# EAGLE board PCB-ETHMG-BOS (EAGLE 7.7.0)
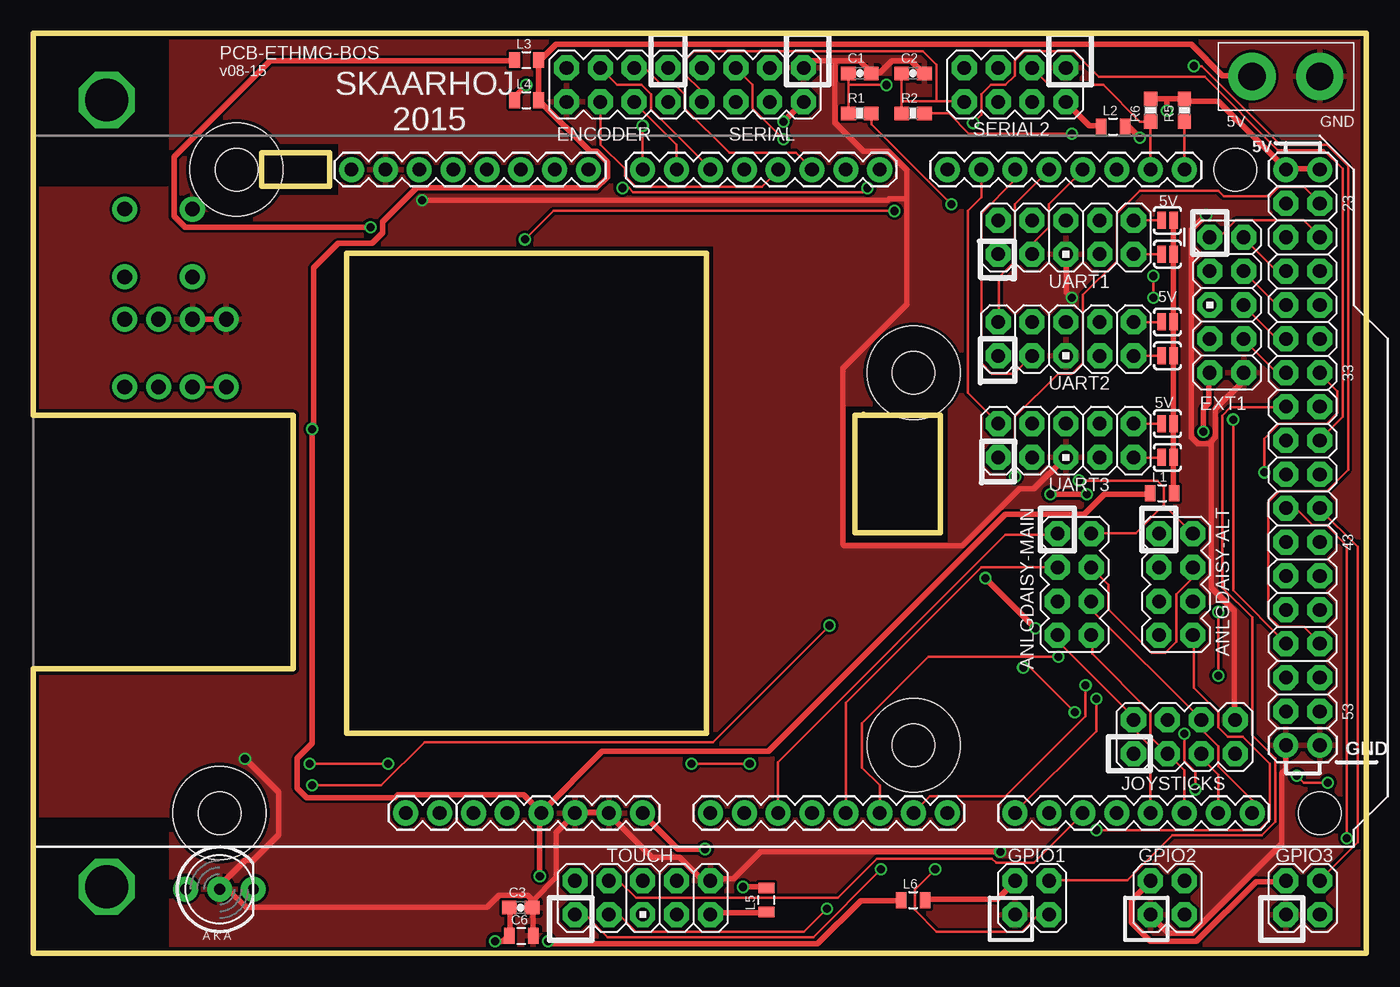
[diagram p0: board, top side]
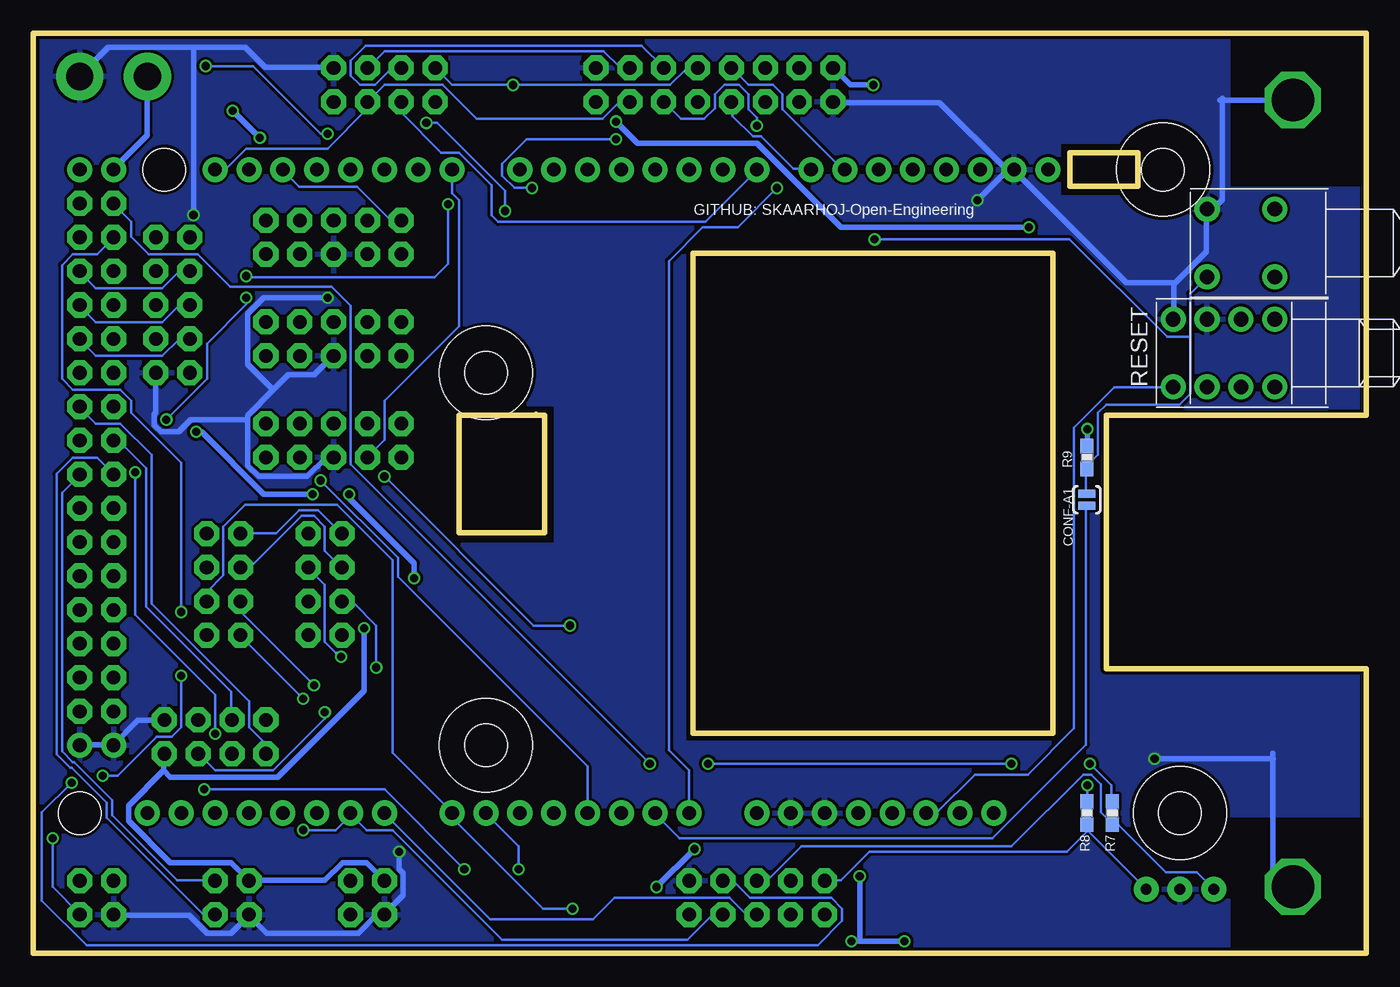
[diagram p1: board, bottom side, seen from below]

Size 100 x 69 mm. Coordinates in mm from the lower left corner, seen from the top.
Outline: 0,0 0,21.34 19.5,21.34 19.5,40.34 0,40.34 0,69 100,69 100,0 0,0
Copper layers (1*16): Top 0.035mm / dielectric 1.5mm / Bottom 0.035mm
Design rules "Fusion_eagle_rule_v1.1": minimum track width 6mil, minimum drill 12mil, track to track 6mil, track to pad 6mil, pad to pad 6mil, via to via 6mil, smd to smd 0mil, copper to edge 10mil, drill to drill 10mil, minimum pad ring 10mil, minimum via ring 6mil, stop-mask expansion 2mil, vias tented up to drill 100mil, thermal gap 10mil
Net classes: 0 default: width 0.203 mm, drill 0.61 mm, clearance 0.203 mm; 1 Power: width 0.406 mm, drill 0.61 mm, clearance 0.203 mm; 2 RELAY LINES: width 0.305 mm, clearance 0.203 mm; 3 INput lines: clearance 0.203 mm
Holes 7 mm at 13.97,10.53 15.24,58.78 66.04,43.55 66.04,15.61
tRestrict: area 0,0 to 10.2,10.2; area 0,57.5 to 10.2,68.9; area 61,30.8 to 68.6,41; area 16.5,56.9 to 22.9,60.7; area 23,16 to 51,53
bRestrict: area 0,57.5 to 10.2,68.9; area 0,0 to 10.2,10.2; area 61,30.8 to 68.6,41; area 16.5,56.9 to 22.9,60.7; area 23,16 to 51,53
Milling: 14 lines

## Footprints (pad centres in the part's own frame; a part is rotated, then mirrored left to right if it is on the bottom)
2X4 = drill 1.016 pad 1.88 octagon: 1 -3.81,-1.27; 2 -3.81,1.27; 3 -1.27,-1.27; 4 -1.27,1.27; 5 1.27,-1.27; 6 1.27,1.27; 7 3.81,-1.27; 8 3.81,1.27
0603-CAP = smd 1.1 x 1: 1 -0.85,0; 2 0.85,0
0805 = smd 0.8 x 1.2: 1 -0.9,0; 2 0.9,0
PUSHBUTTON = drill 1.1 pad 1.88: 1 2.54,2.54; 2 2.54,-2.54; 3 -2.54,2.54; 4 -2.54,-2.54
SJ_2S-NO = smd 0.635 x 1.27: 1 -0.45,0; 2 0.45,0
AVR_ICSP = drill 1.016 pad 1.88 octagon: 1 -1.27,5.08; 2 1.27,5.08; 3 -1.27,2.54; 4 1.27,2.54; 5 -1.27,0; 6 1.27,0; 7 -1.27,-2.54; 8 1.27,-2.54; 9 -1.27,-5.08; 10 1.27,-5.08
2X2 = drill 1.016 pad 1.88 octagon: 1 -3.81,-1.27; 2 -3.81,1.27; 3 -1.27,-1.27; 4 -1.27,1.27
1X02 = drill 1.016 pad 1.88: 1 0,0; 2 2.54,0
1X02_XTRA_BIG = drill 2.057 pad 3.556: 1 -2.54,0; 2 2.54,0
0603-RES = smd 1.1 x 1: 1 -0.85,0; 2 0.85,0
ARDUINO_MEGA = drill 1.016 pad 1.88: 0 63.5,50.8; 1 60.96,50.8; 2 58.42,50.8; 3 55.88,50.8; 3.3V 35.56,2.54; 4 53.34,50.8; 5 50.8,50.8; 5V@0 38.1,2.54; 5V@1 93.98,50.8; 5V@2 96.52,50.8; 6 48.26,50.8; 7 45.72,50.8; 8 41.656,50.8; 9 39.116,50.8; 10 36.576,50.8; 11 34.036,50.8; 12 31.496,50.8; 13 28.956,50.8; 14 68.58,50.8; 15 71.12,50.8; 16 73.66,50.8; 17 76.2,50.8; 18 78.74,50.8; 19 81.28,50.8; 20 83.82,50.8; 21 86.36,50.8; A0 50.8,2.54; A1 53.34,2.54; A2 55.88,2.54; A3 58.42,2.54; A4 60.96,2.54; A5 63.5,2.54; A6 66.04,2.54; A7 68.58,2.54; A8 73.66,2.54; A9 76.2,2.54; A10 78.74,2.54; A11 81.28,2.54; A12 83.82,2.54; A13 86.36,2.54; A14 88.9,2.54; A15 91.44,2.54; AREF 23.876,50.8; GND@0 40.64,2.54; GND@1 43.18,2.54; GND@2 93.98,7.62; GND@3 96.52,7.62; GND@4 26.416,50.8; RESET 33.02,2.54; VIN 45.72,2.54 | drill 1.016 pad 1.88 octagon: 22 93.98,48.26; 23 96.52,48.26; 24 93.98,45.72; 25 96.52,45.72; 26 93.98,43.18; 27 96.52,43.18; 28 93.98,40.64; 29 96.52,40.64; 30 93.98,38.1; 31 96.52,38.1; 32 93.98,35.56; 33 96.52,35.56; 34 93.98,33.02; 35 96.52,33.02; 36 93.98,30.48; 37 96.52,30.48; 38 93.98,27.94; 39 96.52,27.94; 40 93.98,25.4; 41 96.52,25.4; 42 93.98,22.86; 43 96.52,22.86; 44 93.98,20.32; 45 96.52,20.32; 46 93.98,17.78; 47 96.52,17.78; 48 93.98,15.24; 49 96.52,15.24; 50 93.98,12.7; 51 96.52,12.7; 52 93.98,10.16; 53 96.52,10.16 | hole 3.2: 15.24,50.8; 13.97,2.54; 66.04,35.56; 66.04,7.62; 90.17,50.8; 96.52,2.54
3.2MMPAD = drill 3.2 octagon: P$1 0,0
LED5MM-BICOLOR = drill 0.813 pad 1.88: A2 2.54,0; A3 -2.54,0; K1 0,0

## Placement (x,y rotation side)
ANLGDAISY-ALT  M04X2  [2X4]  85.72,27.67 270 top
ANLGDAISY-MAIN  M04X2  [2X4]  78.11,27.67 270 top
C1  220pF?  [0603-CAP]  62,66 0 top
C2  220pF?  [0603-CAP]  66,66 0 top
C3  100nF  [0603-CAP]  36.57,3.43 0 top
C6  22uF  [0805]  36.61,1.3 0 top
CONF  [PUSHBUTTON]  9.4,53.27 90 bottom
CONF-A1  SOLDERJUMPERNO  [SJ_2S-NO]  20.95,34.02 270 bottom
ENCODER  M04X2  [2X4]  43.81,65.14 180 top
EXT1  M05X2PTH  [AVR_ICSP]  89.53,48.62 0 top
GPIO1  M02X2  [2X2]  77.47,4.17 0 top
GPIO2  M02X2  [2X2]  87.63,4.17 0 top
GPIO3  M02X2  [2X2]  97.79,4.17 0 top
JOYSTICKS  M04X2  [2X4]  86.36,16.24 0 top
JP1  [1X02]  27.94,10.53 0 top
JP8  [1X02_XTRA_BIG]  93.98,65.77 180 top
L1  [0805]  84.7,34.51 0 top
L2  [0805]  81,62 0 top
L3  [0805]  37,67 0 top
L4  [0805]  37,64 0 top
L5  [0805]  55,4 90 top
L6  [0805]  66,4 0 top
R1  ?  [0603-RES]  62,63 0 top
R2  ?  [0603-RES]  66,63 0 top
R5  1K5  [0603-RES]  86.36,63.23 90 top
R6  1K5  [0603-RES]  83.82,63.23 90 top
R7  270R  [0603-RES]  19.05,10.53 90 bottom
R8  270R  [0603-RES]  20.95,10.53 90 bottom
R9  10K  [0603-RES]  20.95,37.2 270 bottom
RESET  [PUSHBUTTON]  11.94,45.02 90 bottom
RESETA  [PUSHBUTTON]  9.4,45.02 90 bottom
SERIAL  M04X2  [2X4]  53.98,65.14 180 top
SERIAL2  M04X2  [2X4]  73.66,65.14 180 top
SJ1  SOLDERJUMPERNO  [SJ_2S-NO]  85.09,54.98 0 top
SJ2  SOLDERJUMPERNO  [SJ_2S-NO]  85.09,52.44 180 top
SJ3  SOLDERJUMPERNO  [SJ_2S-NO]  85.09,44.81 180 top
SJ4  SOLDERJUMPERNO  [SJ_2S-NO]  85.09,47.35 0 top
SJ5  SOLDERJUMPERNO  [SJ_2S-NO]  85.09,39.73 0 top
SJ6  SOLDERJUMPERNO  [SJ_2S-NO]  85.09,37.2 180 top
TOUCH  M05X2PTH  [AVR_ICSP]  45.72,4.17 90 top
U1  ARDUINO-MEGAFULL  [ARDUINO_MEGA]  0,7.99 0 top
U$1  GNDPAD  [3.2MMPAD]  5.5,64 0 top
U$15  LEDBICOLOR-AKA  [LED5MM-BICOLOR]  13.97,4.81 0 top
U$20  GNDPAD  [3.2MMPAD]  5.5,5 0 top
UART1  M05X2PTH  [AVR_ICSP]  77.47,53.7 90 top
UART2  M05X2PTH  [AVR_ICSP]  77.47,46.09 90 top
UART3  M05X2PTH  [AVR_ICSP]  77.47,38.47 90 top

## Library data of the parts
ANLGDAISY-ALT ANLGDAISY-MAIN C1-C3 C6 CONF-A1 ENCODER EXT1 JOYSTICKS JP1 JP8 L1-L6 R1 R2 R5-R9 SERIAL SERIAL2 SJ1-SJ6 TOUCH UART1-UART3 = SparkFun
CONF GPIO1-GPIO3 RESET RESETA U1 U$1 U$15 U$20 = SKAARHOJ

## Nets
5V [Power]: C3.1 C6.1 JP8.2 L1.1 L2.2 L3.2 L4.2 L6.1 R5.2 R6.2 R9.1 U1.5V@0 U1.5V@1 U1.5V@2
A0: SERIAL2.5 SERIAL.5 U1.A0
A1: CONF-A1.2 U1.A1
A2: ANLGDAISY-ALT.1 ANLGDAISY-MAIN.1 U1.A2
A3: ANLGDAISY-ALT.2 ANLGDAISY-MAIN.2 U1.A3
A4: ANLGDAISY-ALT.3 ANLGDAISY-MAIN.3 U1.A4
A5: ANLGDAISY-ALT.4 ANLGDAISY-MAIN.4 U1.A5
A6: ANLGDAISY-ALT.5 TOUCH.1 U1.A6
A7: ANLGDAISY-ALT.6 TOUCH.3 U1.A7
A8: ANLGDAISY-ALT.7 TOUCH.5 U1.A8
A9: ANLGDAISY-ALT.8 TOUCH.7 U1.A9
A10: TOUCH.4 U1.A10
A11: U1.A11
A12: ANLGDAISY-MAIN.7 JOYSTICKS.2 U1.A12
A13: ANLGDAISY-MAIN.8 JOYSTICKS.3 U1.A13
A14: ANLGDAISY-MAIN.5 JOYSTICKS.5 U1.A14
A15: ANLGDAISY-MAIN.6 JOYSTICKS.6 U1.A15
D2: ENCODER.3 U1.2
D3: ENCODER.6 U1.3
D4: U1.4
D5: ENCODER.5 U1.5
D6: ENCODER.4 U1.6
D7: SERIAL2.6 SERIAL.6 U1.7
D8: ENCODER.2 U1.8
D9: ENCODER.1 U1.9
D22: R7.2 U1.22
D23: R8.2 U1.23
D24: TOUCH.8 U1.24
D37: CONF-A1.1 CONF.3 R9.2 U1.37
EXT1: EXT1.1 U1.25
EXT2: EXT1.2 U1.26
EXT3: EXT1.3 U1.27
EXT4: EXT1.4 U1.28
EXT5: EXT1.5 U1.29
EXT6: EXT1.6 U1.30
EXT7: EXT1.7 U1.31
EXT8: EXT1.8 U1.32
GND [Power]: C1.2 C2.2 C3.2 C6.2 CONF.1 ENCODER.8 EXT1.10 GPIO1.1 GPIO2.1 GPIO3.1 JOYSTICKS.8 JP8.1 RESET.1 RESETA.1 SERIAL2.1 SERIAL.1 TOUCH.10 U1.GND@0 U1.GND@1 U1.GND@2 U1.GND@3 U1.GND@4 U$1.P$1 U$15.K1 U$20.P$1 UART1.5 UART2.5 UART3.5
GPIO1-1: GPIO1.3 U1.33
GPIO1-2: GPIO1.4 U1.34
GPIO2-1: GPIO2.3 U1.38
GPIO2-2: GPIO2.4 U1.39
GPIO3-1: GPIO3.3 U1.40
GPIO3-2: GPIO3.4 U1.41
I2C_SCL: R5.1 SERIAL2.4 SERIAL.4 U1.21
I2C_SDA: R6.1 SERIAL2.3 SERIAL.3 U1.20
MOSI: C2.1 R2.1 SERIAL2.8 SERIAL.8
N$1 [Power]: L2.1 SERIAL2.2
N$2 [Power]: L3.1 SERIAL.2
N$3: SJ6.2 UART3.9
N$4 [Power]: ENCODER.7 L4.1
N$5 [Power]: L5.1 TOUCH.9
N$6: SJ3.2 UART2.9
N$7 [Power]: EXT1.9 GPIO1.2 GPIO2.2 GPIO3.2 JOYSTICKS.7 L6.2
N$8 [Power]: L1.2 SJ1.2 SJ2.1 SJ3.1 SJ4.2 SJ5.2 SJ6.1
N$9: SJ2.2 UART1.9
N$10: SJ1.1 UART1.10
N$11: R1.2 U1.48
N$12: SJ4.1 UART2.10
N$13: SJ5.1 UART3.10
N$14: R2.2 U1.49
N$17: R8.1 TOUCH.2 U$15.A2
N$18: U1.53
N$19: U1.52
N$20: U1.51
N$21: U1.50
N$22: R7.1 TOUCH.6 U$15.A3
N$24: U1.47
N$25: U1.46
N$26: U1.45
N$27: U1.44
N$28: U1.43
N$29: U1.42
RESET: RESET.3 RESETA.3 U1.RESET
RXD1: U1.19 UART1.2
RXD2: U1.17 UART2.2
RXD3: U1.15 UART3.2
SCLK: C1.1 R1.1 SERIAL2.7 SERIAL.7
SW1: JOYSTICKS.1 U1.35
SW2: JOYSTICKS.4 U1.36
TXD1: U1.18 UART1.3
TXD2: U1.16 UART2.3
TXD3: U1.14 UART3.3
VIN [Power]: L5.2 U1.VIN

## Tracks (layer width: path | path; a pad name or v marks a point on that pad's centre or on a via)
5V  (via drill 0.61)
  Top 0.406: C3.1 35.76,3.35 35.76,1.32 C6.1 35.56,1.22 35.26,0.91 v34.65,0.91 | v38.61,0.91 38.81,0.71 58.83,0.71 62.08,3.96 65.02,3.96 L6.1 | 85.04,64.11 86.36,64.11 R5.2 86.46,63.91 88.9,63.91 93.98,58.83 U1.5V@1 94.08,58.83 96.52,58.83 U1.5V@2 | 85.04,64.11 83.82,64.11 R6.2 | v83.01,61.16 82.19,61.98 81.99,61.98 L2.2 | 85.04,64.11 v85.04,63.2 | U1.5V@0 38.1,10.57 36.78,11.89 27.33,11.89 27.13,11.68 20.52,11.68 19.81,12.39 19.81,14.63 20.93,15.75 v20.93,39.32 21.03,39.42 21.03,51.41 22.86,53.24 25.4,53.24 26.21,54.05 26.21,54.86 28.75,57.4 42.27,57.4 43.08,58.22 43.08,59.33 42.27,60.15 41.76,60.15 38,63.91 L4.2 37.9,66.95 L3.2 38.1,67.06 39.22,68.17 86.87,68.17 89.2,65.84 91.44,65.84 JP8.2 | L1.1 83.72,34.44 80.37,34.44 78.84,32.92 72.95,32.92 55.17,15.14 42.67,15.14 38.2,10.67 U1.5V@0 | v38,5.79 38,10.36 U1.5V@0
  Bottom 0.406: v34.65,0.91 38,0.91 | 38,0.91 v38.61,0.91 | v85.04,63.2 v83.01,61.16 | JP8.2 91.44,61.37 93.98,58.83 U1.5V@1 | v20.93,39.32 20.93,38.1 R9.1 | v38,5.79 38,0.91
A0  (via drill 0.61)
  Top 0.203: v44.2,57.4 44.7,57.4 45.01,57.1 62.28,57.1 v62.59,57.4 | v56.29,61.06 53.95,63.4 53.95,65.13 52.73,66.34 SERIAL.5
  Bottom 0.203: U1.A0 50.8,13.72 52.32,15.24 52.32,51.92 49.78,54.46 47.14,54.46 v44.2,57.4 | v62.59,57.4 63.91,57.4 64.82,58.32 64.82,59.23 62.99,61.06 v56.29,61.06 | SERIAL2.5 72.44,66.34 73.15,66.34 74.37,65.13 75.49,65.13 76.2,65.84 76.2,66.95 75.08,68.07 54.36,68.07 52.73,66.45 SERIAL.5
A1
  Bottom 0.203: CONF-A1.2 21.03,33.53 21.03,15.65 28.04,8.64 51.51,8.64 53.34,10.46 U1.A1
A2
  Top 0.203: U1.A2 55.88,14.33 72.95,31.39 76.81,31.39 ANLGDAISY-MAIN.1
  Bottom 0.203: ANLGDAISY-ALT.1 84.43,31.5 81.79,31.5 80.06,33.22 78.64,33.22 76.91,31.5 ANLGDAISY-MAIN.1
A3  (via drill 0.61)
  Top 0.203: v78.44,35.46 84.33,35.46 84.84,34.95 84.84,33.63 | 84.84,33.63 86.97,31.5 ANLGDAISY-ALT.2 | 84.84,33.63 82.7,31.5 79.45,31.5 ANLGDAISY-MAIN.2
  Bottom 0.203: U1.A3 58.42,14.02 72.64,28.25 72.64,29.67 v78.44,35.46
A4
  Top 0.203: U1.A4 60.96,18.8 71.12,28.96 76.81,28.96 ANLGDAISY-MAIN.3
  Bottom 0.203: ANLGDAISY-ALT.3 84.43,28.96 83.72,28.96 79.86,32.82 78.94,32.82 78.13,32 78.13,30.18 76.91,28.96 ANLGDAISY-MAIN.3
A5  (via drill 0.61)
  Top 0.203: U1.A5 63.5,12.6 62.18,13.92 62.18,17.27 67.16,22.25 v76.91,22.25 | ANLGDAISY-ALT.4 86.97,28.85 86.97,28.14 85.75,26.92 85.75,23.37 84.94,22.55 83.92,22.55 80.67,25.81 80.67,27.64 79.45,28.85 ANLGDAISY-MAIN.4
  Bottom 0.203: v76.91,22.25 77.22,22.55 77.32,22.55 78.13,23.37 78.13,27.64 79.35,28.85 ANLGDAISY-MAIN.4
A6  (via drill 0.61)
  Top 0.203: v63.6,6.3 58.52,1.22 43.08,1.22 41.45,2.85 40.64,2.85 TOUCH.1 | v78.94,20.12 78.94,17.78 72.95,11.79 67.26,11.79 66.04,10.57 U1.A6
  Bottom 0.203: v63.6,6.3 63.6,8.03 66.04,10.46 U1.A6 | v78.94,20.12 84.43,25.6 84.43,26.31 ANLGDAISY-ALT.5
A7  (via drill 0.61)
  Top 0.203: v59.54,3.35 57.81,1.63 45.21,1.63 43.99,2.85 43.18,2.85 TOUCH.3
  Bottom 0.203: v59.54,3.35 61.77,3.35 68.58,10.16 U1.A7 68.58,10.57 73.05,15.04 73.05,29.46 77.22,33.63 84.12,33.63 85.75,32 85.75,28.35 86.97,27.13 86.97,26.42 ANLGDAISY-ALT.6
A8  (via drill 0.61)
  Top 0.203: v79.76,19.1 79.76,16.66 73.66,10.57 U1.A8
  Bottom 0.203: TOUCH.5 45.72,2.95 46.53,2.95 47.75,4.17 56.39,4.17 58.01,2.54 65.73,2.54 73.66,10.46 U1.A8 | v79.76,19.1 84.43,23.77 ANLGDAISY-ALT.7
A9  (via drill 0.61)
  Top 0.203: v79.76,9.25 91.95,9.25 92.76,10.06 92.76,14.22 90.73,16.26 89.61,16.26 88.9,16.97 88.9,18.09 87.07,19.91 87.07,23.77 ANLGDAISY-ALT.8
  Bottom 0.203: TOUCH.7 48.26,2.85 49.07,2.85 50.9,1.02 64.82,1.02 73.05,9.25 74.98,9.25 76.2,10.46 U1.A9 76.2,10.36 77.32,9.25 v79.76,9.25
A10
  Top 0.203: TOUCH.4 43.18,5.38 43.99,5.38 45.21,4.17 60.35,4.17 63.3,7.11 71.93,7.11 72.24,6.81 75.08,6.81 78.74,10.46 U1.A10
A12
  Top 0.203: U1.A12 83.82,15.54 82.6,16.76 82.6,17.48 JOYSTICKS.2 82.5,17.58 82.5,17.78 76.91,23.37 76.91,23.77 ANLGDAISY-MAIN.7
A13
  Top 0.203: U1.A13 86.36,13.72 85.14,14.94 JOYSTICKS.3 85.04,15.04 83.82,16.26 83.82,18.09 79.45,22.45 79.45,23.77 ANLGDAISY-MAIN.8
A14  (via drill 0.61)
  Top 0.203: U1.A14 88.9,13.41 87.68,14.63 87.68,14.94 JOYSTICKS.5 | v74.27,21.44 74.78,21.44 v78.13,18.09
  Bottom 0.203: v74.27,21.44 74.27,24.59 76,26.31 76.81,26.31 ANLGDAISY-MAIN.5 | v78.13,18.09 78.13,17.58 81.99,13.72 86.36,13.72 87.58,14.94 JOYSTICKS.5
A15
  Top 0.203: U1.A15 91.44,11.48 88.9,14.02 88.9,15.54 87.68,16.76 87.68,17.48 JOYSTICKS.6 87.58,17.58 79.45,25.7 79.45,26.31 ANLGDAISY-MAIN.6
D2
  Top 0.203: ENCODER.3 45.11,66.34 45.92,66.34 47.14,65.13 48.16,65.13 48.87,64.41 48.87,63.4 52.22,60.05 57.2,60.05 58.42,58.83 U1.2
D3
  Top 0.203: ENCODER.6 42.57,63.8 42.57,60.66 44.4,58.83 44.4,58.32 45.21,57.51 54.66,57.51 55.88,58.73 U1.3
D5
  Top 0.203: U1.5 50.8,58.83 46.33,63.3 46.33,64.41 45.62,65.13 43.79,65.13 42.57,66.34 ENCODER.5
D6
  Top 0.203: U1.6 48.26,60.66 45.11,63.8 ENCODER.4
D7  (via drill 0.61)
  Top 0.203: v45.72,62.08 U1.7
  Bottom 0.203: v45.72,62.08 45.72,62.69 46.33,63.3 46.33,64.41 47.04,65.13 48.16,65.13 48.87,64.41 48.87,63.4 49.68,62.59 51.41,62.59 52.63,63.8 SERIAL.6 | SERIAL2.6 72.34,63.8 72.34,62.99 69.39,60.05 68.07,60.05 65.63,57.61 65.63,55.37 65.13,54.86 49.58,54.86 45.72,58.73 U1.7
D8
  Bottom 0.203: U1.8 41.66,58.83 42.98,58.83 45.41,61.27 46.02,61.27 47.55,62.79 47.55,63.8 ENCODER.2
D9
  Bottom 0.203: U1.9 39.12,58.83 39.32,58.83 43.79,63.3 43.79,64.41 44.5,65.13 46.33,65.13 47.55,66.34 ENCODER.1
D22  (via drill 0.61)
  Top 0.203: v26.62,14.22 v20.73,14.22 | v53.75,14.22 v49.38,14.22
  Bottom 0.203: v20.73,14.22 19.1,12.6 19.1,11.38 R7.2 | v49.38,14.22 v26.62,14.22 | v53.75,14.22 76.2,36.68 76.2,48.56 77.62,49.99 85.24,49.99 87.68,52.43 91.34,52.43 92.66,53.75 92.66,54.86 93.98,56.19 U1.22
D23  (via drill 0.61)
  Top 0.203: v20.93,12.6 26.11,12.6 29.36,15.85 51,15.85 v59.74,24.59 | v73.66,35.76 73.66,40.23 76.91,43.48 77.93,43.48 78.74,44.3 78.74,49.38 81.28,51.92 81.28,55.47 83.01,57.2 88.9,57.2 89.31,56.79 92.76,56.79 93.47,57.51 95.3,57.51 96.52,56.29 U1.23
  Bottom 0.203: v20.93,12.6 20.93,11.38 R8.2 | v59.74,24.59 62.48,24.59 v73.66,35.76
D24  (via drill 0.61)
  Top 0.203: v97.13,12.8 95.3,12.8 v94.79,13.31 | v88.9,25.6 v88.9,20.83
  Bottom 0.203: v97.13,12.8 99.36,10.57 99.36,3.96 96.01,0.61 41.15,0.61 39.32,2.44 39.32,3.35 40.13,4.17 46.23,4.17 47.45,5.38 48.26,5.38 TOUCH.8 | v94.79,13.31 93.67,13.31 90.73,16.26 89.61,16.26 88.9,16.97 v88.9,20.83 | v88.9,25.6 88.9,36.78 92.66,40.54 92.66,41.45 93.47,42.27 97.03,42.27 97.84,43.08 97.84,51.61 97.03,52.43 95.2,52.43 93.98,53.65 U1.24
D37  (via drill 0.61)
  Top 0.203: v70.51,62.28 71.12,62.89 71.12,64.41 71.83,65.13 72.95,65.13 73.66,65.84 73.66,66.95 74.37,67.67 78.03,67.67 79.96,65.73 87.88,65.73 93.37,60.25 96.83,60.25 98.25,58.83 98.25,40.23 96.52,38.51 U1.37 | v64.62,55.68 39.01,55.68 v36.88,53.54
  Bottom 0.203: CONF-A1.1 21.03,34.54 21.03,36.27 R9.2 20.93,36.37 20.93,36.58 20.12,37.39 20.12,40.54 19.51,41.15 14.02,41.15 13.21,41.96 13.21,46.23 | 13.21,46.23 13.21,49.48 11.99,50.7 CONF.3 | v70.51,62.28 69.7,62.28 64.62,57.2 v64.62,55.68 | v36.88,53.54 22.25,53.54 14.94,46.23 13.21,46.23
EXT1
  Top 0.203: EXT1.1 88.29,53.75 89,53.75 90.22,54.97 95.3,54.97 96.52,53.75 U1.25
EXT2
  Top 0.203: U1.26 93.98,51.21 93.27,51.21 90.83,53.65 EXT1.2
EXT3
  Bottom 0.203: EXT1.3 88.29,51.1 89.1,51.1 90.32,49.89 95.3,49.89 96.52,51.1 U1.27
EXT4
  Top 0.203: U1.28 93.98,48.67 93.27,48.67 90.83,51.1 EXT1.4
EXT5
  Bottom 0.203: EXT1.5 88.29,48.56 89.1,48.56 90.32,47.35 95.3,47.35 96.52,48.56 U1.29
EXT6
  Top 0.203: U1.30 93.98,46.13 93.27,46.13 90.83,48.56 EXT1.6
EXT7
  Bottom 0.203: EXT1.7 88.29,46.02 89.1,46.02 90.32,44.81 95.3,44.81 96.52,46.02 U1.31
EXT8
  Top 0.203: U1.32 93.98,43.59 93.27,43.59 90.83,46.02 EXT1.8
GND  (via drill 0.61)
  Top 0.406: RESETA.1 11.99,47.55 14.43,47.55 RESET.1 | C6.2 37.49,1.32 37.49,3.35 C3.2 37.49,3.56 37.49,3.96 | 37.49,3.96 39.22,5.69 39.22,9.04 40.64,10.46 U1.GND@0 40.74,10.57 43.18,10.57 U1.GND@1 43.28,10.36 46.43,7.21 48.46,7.21 50.19,5.49 50.8,5.49 TOUCH.10 50.9,5.59 52.53,5.59 54.56,7.62 v72.54,7.62 | 37.49,3.96 37.08,4.37 34.95,4.37 34.04,3.45 15.95,3.45 14.63,4.78 14.02,4.78 U$15.K1 13.97,5.08 15.88,6.99 16.51,6.99 18.41,8.89 18.41,12.06 v15.88,14.61 | U1.GND@2 93.98,13.82 93.67,13.51 93.67,8.23 86.97,1.52 85.14,1.52 83.82,2.85 GPIO2.1 | C2.2 66.75,66.04 65.84,66.95 64.41,66.95 63.5,66.04 62.89,66.04 C1.2 62.79,66.14 61.98,66.95 60.15,66.95 | 60.15,66.95 58.32,66.95 57.81,66.45 SERIAL.1 | v77.93,49.17 77.52,49.58 77.52,52.43 UART1.5 | 60.15,66.95 60.15,62.28 62.28,60.15 64.11,60.15 65.53,58.73 65.53,56.59 | 65.53,56.59 65.53,48.67 60.76,43.89 60.76,30.68 60.86,30.58 69.7,30.58 73.97,34.85 75.08,34.85 77.42,37.19 UART3.5 | v87.99,55.37 86.87,54.25 86.87,38.71 87.38,38.2 88.19,38.2 88.29,38.3 | 88.29,38.3 88.7,38.71 88.7,40.84 90.73,42.88 90.73,43.48 EXT1.10 | JOYSTICKS.8 90.12,17.58 90.12,25.7 88.39,27.43 88.39,38.2 88.29,38.3 | v29.16,56.49 64.11,56.49 64.21,56.59 65.53,56.59
  Bottom 0.406: 14.43,50.19 11.99,52.63 11.99,55.78 CONF.1 11.43,55.88 10.79,56.52 10.79,64 | 14.43,50.19 14.43,47.65 RESET.1 | U1.GND@4 26.42,58.83 27.03,58.83 32,63.8 39.93,63.8 ENCODER.8 | 14.43,50.19 14.53,50.29 17.98,50.29 26.31,58.62 U1.GND@4 | JOYSTICKS.8 90.22,17.48 92.15,17.48 93.98,15.65 U1.GND@2 94.08,15.65 96.52,15.65 U1.GND@3 | GPIO3.1 93.98,2.85 88.29,2.85 86.97,1.52 85.14,1.52 83.92,2.74 GPIO2.1 83.82,2.85 82.5,1.52 75.59,1.52 74.27,2.85 73.66,2.85 GPIO1.1 73.56,3.05 72.24,4.37 72.24,5.99 72.54,6.3 v72.54,7.62 | 87.99,67.97 94.39,67.97 96.52,65.84 JP8.1 | 87.99,67.97 84.12,67.97 82.6,66.45 77.52,66.45 SERIAL2.1 | 83.92,40.03 83.92,40.34 81.99,42.27 | 83.92,40.03 83.92,36.58 83.11,35.76 79.45,35.76 78.03,37.19 77.52,37.19 UART3.5 | 81.99,42.27 80.87,43.38 78.94,43.38 77.52,44.81 UART2.5 | v77.93,49.17 82.7,49.17 83.92,47.95 83.92,44.2 81.99,42.27 | 83.92,40.03 88.19,40.03 89.1,39.12 90.42,39.12 90.93,39.62 90.93,40.44 90.83,40.54 90.83,43.48 EXT1.10 | v87.99,55.37 87.99,67.97 | v29.16,56.49 27.13,58.52 27.13,58.73 U1.GND@4 | U$1.P$1 10.79,64 | 10.79,64 11,64 | U$20.P$1 7,5 7,14.61 | 7,14.61 7,15 | 10.79,64.14 10.79,64 | 7,14.61 v15.88,14.61 | 6.99,14.61 7,14.61
  pour Top: 0,0 100,0 100,69 0,69
  pour Bottom: 0,0 100,0 100,69 0,69
GPIO1-1  (via drill 0.61)
  Top 0.203: v67.67,6.3 66.14,4.78 66.14,3.25 67.77,1.63 74.17,1.63 75.39,2.85 76.2,2.85 GPIO1.3 | v87.17,12.29 87.17,13.61 86.36,14.43 v86.36,16.46 | v92.35,36.07 92.35,38.61 93.47,39.73 97.03,39.73 97.84,40.54 97.84,42.16 96.52,43.48 U1.33
  Bottom 0.203: v67.67,6.3 73.66,12.29 v87.17,12.29 | v86.36,16.46 86.36,19.41 92.35,25.4 v92.35,36.07
GPIO1-2
  Top 0.203: GPIO1.4 76.2,5.49 82.09,5.49 85.45,8.84 92.15,8.84 93.17,9.86 93.17,14.63 91.44,16.36 91.44,25.2 89.2,27.43 89.2,40.34 89.81,40.95 93.98,40.95 U1.34
GPIO2-1
  Bottom 0.203: GPIO2.3 86.36,2.95 87.27,2.95 94.49,10.16 94.49,11.28 97.13,13.92 97.23,13.92 98.25,14.94 98.25,35.97 97.03,37.19 95.2,37.19 93.98,35.97 U1.38
GPIO2-2
  Bottom 0.203: GPIO2.4 86.36,5.49 89.2,5.49 94.08,10.36 94.08,11.48 96.93,14.33 97.03,14.33 97.84,15.14 97.84,34.54 96.52,35.87 U1.39
GPIO3-1  (via drill 0.61)
  Top 0.203: v98.55,8.64 98.55,30.58 97.03,32.11 96.01,32.11 94.79,33.33 93.98,33.33 U1.40
  Bottom 0.203: v98.55,8.64 98.55,4.98 96.52,2.95 GPIO3.3
GPIO3-2
  Top 0.203: GPIO3.4 96.52,5.49 99.36,8.33 99.36,30.48 96.52,33.33 U1.41
I2C_SCL
  Top 0.203: U1.21 R5.1
  Bottom 0.203: SERIAL.4 55.27,63.8 56.08,63.8 57.3,62.59 66.75,62.59 69.29,65.13 73.66,65.13 74.88,63.91 SERIAL2.4 74.98,63.8 74.98,63.3 77.93,60.35 84.02,60.35 85.55,58.83 86.36,58.83 U1.21
I2C_SDA
  Top 0.203: U1.20 R6.1 83.01,62.38 80.26,65.13 76.2,65.13 74.98,66.34 SERIAL2.3
  Bottom 0.203: SERIAL.3 55.27,66.45 55.98,66.45 57.2,67.67 73.66,67.67 74.88,66.45 SERIAL2.3
MOSI
  Top 0.203: 65.13,63.91 65.13,65.94 C2.1 | 65.13,63.91 65.13,63.09 R2.1 | 67.77,63.91 69.8,63.91 SERIAL2.8 | 67.77,63.91 65.13,63.91 | 67.77,63.91 67.77,66.65 66.75,67.67 49.58,67.67 48.87,66.95 48.87,65.94 50.09,64.72 50.09,63.91 SERIAL.8
N$1
  Top 0.406: L2.1 80.06,62.08 79.25,62.08 77.52,63.8 SERIAL2.2
N$2  (via drill 0.61)
  Top 0.406: v25.3,54.46 11.38,54.46 10.57,55.27 10.57,59.74 17.78,66.95 36.07,66.95 L3.1 | v56.29,62.38 57.71,63.8 SERIAL.2
  Bottom 0.406: v25.3,54.46 39.42,54.46 45.72,60.76 54.66,60.76 v56.29,62.38
N$3
  Top 0.203: SJ6.2 84.63,37.19 82.6,37.19 UART3.9
N$4  (via drill 0.61)
  Top 0.406: v36.98,65.13 36.17,64.31 36.17,64.01 L4.1
  Bottom 0.406: v36.98,65.13 38.71,65.13 39.93,66.34 ENCODER.7
N$5
  Top 0.406: L5.1 54.97,3.05 50.9,3.05 50.8,2.95 TOUCH.9
N$6
  Top 0.203: SJ3.2 82.6,44.81 UART2.9
N$7  (via drill 0.61)
  Top 0.406: L6.2 66.95,4.06 72.34,4.06 73.66,5.38 GPIO1.2 | GPIO3.2 93.98,5.38 91.75,5.38 87.27,0.91 83.82,0.91 82.4,2.34 82.4,3.96 83.82,5.38 GPIO2.2 | v87.78,39.12 87.78,40.84 88.19,41.25 88.19,43.48 EXT1.9 | v76.3,34.44 v79.05,34.44 | v75.18,24.38 v71.42,28.14
  Bottom 0.406: GPIO1.2 73.66,5.49 74.98,6.81 76.81,6.81 78.13,5.49 83.82,5.49 GPIO2.2 83.92,5.59 85.14,6.81 89.71,6.81 92.86,9.96 92.86,11.07 90.22,13.72 | 90.22,13.72 90.22,14.94 JOYSTICKS.7 | v87.78,39.12 87.38,39.12 82.7,34.44 v79.05,34.44 | v76.3,34.44 76.3,34.14 71.42,29.26 v71.42,28.14 | v75.18,24.38 75.18,19.71 81.69,13.21 89.71,13.21 90.22,13.72
N$8
  Top 0.406: SJ1.2 85.55,54.97 85.55,52.53 SJ2.1 85.55,52.32 85.55,47.55 SJ4.2 85.55,44.91 SJ3.1 85.55,44.7 85.55,39.93 SJ5.2 85.55,37.39 SJ6.1 85.55,37.19 85.55,34.54 L1.2
N$9
  Top 0.203: SJ2.2 84.63,52.43 82.6,52.43 UART1.9
N$10
  Top 0.203: SJ1.1 84.63,54.97 82.6,54.97 UART1.10
N$11  (via drill 0.61)
  Top 0.203: v68.89,56.19 62.89,62.18 62.89,62.99 R1.2 | v84.02,49.17 v84.02,50.8 | v90.02,40.03 90.02,27.23 93.98,23.27 U1.48
  Bottom 0.203: v68.89,56.19 68.89,51.71 69.9,50.7 83.92,50.7 v84.02,50.8 | v84.02,49.17 84.02,48.67 86.97,45.72 86.97,43.08 v90.02,40.03
N$12
  Top 0.203: SJ4.1 82.6,47.35 UART2.10
N$13
  Top 0.203: SJ5.1 82.6,39.73 UART3.10
N$14  (via drill 0.61)
  Top 0.203: v77.93,61.47 70.21,61.47 68.68,62.99 R2.2 | v87.07,66.55 87.68,66.55 93.57,60.66 97.03,60.66 98.65,59.03 98.65,36.27 97.03,34.65 93.47,34.65 92.66,33.83 92.66,25.3 93.47,24.49 95.3,24.49 96.52,23.27 U1.49
  Bottom 0.203: v77.93,61.47 78.44,61.47 83.52,66.55 v87.07,66.55
N$17
  Bottom 0.203: U$15.A2 16.56,4.88 20.93,9.25 20.93,9.65 R8.1 20.93,9.14 22.45,7.62 37.29,7.62 39.42,5.49 40.64,5.49 TOUCH.2
N$22
  Bottom 0.203: U$15.A3 11.48,4.88 12.7,6.1 15.04,6.1 18.59,9.65 19,9.65 R7.1 19.1,9.75 19.91,10.57 19.91,12.7 20.62,13.41 21.23,13.41 26.62,8.03 42.37,8.03 44.91,5.49 45.72,5.49 TOUCH.6
RESET
  Top 0.203: RESETA.3 11.99,42.47 14.43,42.47 RESET.3
  Bottom 0.203: U1.RESET 33.02,10.57 32.21,10.57 29.36,13.41 25.4,13.41 21.95,16.87 21.95,39.42 18.9,42.47 14.53,42.47 RESET.3
RXD1
  Bottom 0.203: UART1.2 72.44,55.07 73.25,55.07 75.69,57.51 80.06,57.51 81.28,58.73 U1.19
RXD2
  Top 0.203: UART2.2 72.44,47.45 72.44,50.7 73.66,51.92 73.66,56.19 76.2,58.73 U1.17
RXD3
  Top 0.203: U1.15 71.12,56.69 70.1,55.68 70.1,42.06 72.34,39.83 UART3.2
SCLK  (via drill 0.61)
  Top 0.203: 61.16,65.13 61.16,65.94 C1.1 | 61.16,65.13 61.16,63.09 R1.1 | v64.01,65.13 61.16,65.13
  Bottom 0.203: SERIAL2.7 69.8,66.34 68.58,65.13 v64.01,65.13 52.22,65.13 51,66.34 50.19,66.34 SERIAL.7
SW1
  Bottom 0.203: JOYSTICKS.1 82.6,15.04 82.6,15.75 83.82,16.97 83.82,18.9 91.14,26.21 91.14,37.39 93.47,39.73 95.3,39.73 96.52,40.95 U1.35
SW2
  Bottom 0.203: JOYSTICKS.4 85.14,17.58 85.14,19.61 91.54,26.01 91.54,36.37 93.57,38.41 93.98,38.41 U1.36
TXD1
  Top 0.203: UART1.3 74.98,52.53 74.98,53.24 76.2,54.46 76.2,56.19 78.74,58.73 U1.18
TXD2
  Top 0.203: U1.16 73.66,58.01 71.12,55.47 71.12,44.3 71.93,43.48 73.56,43.48 74.88,44.81 UART2.3
TXD3
  Bottom 0.203: U1.14 68.58,57 68.07,56.49 68.07,47.04 73.66,41.45 73.66,38.51 74.88,37.29 UART3.3
VIN  (via drill 0.61)
  Top 0.406: v53.24,4.98 54.97,4.98 L5.2 | v50.39,7.82 48.36,7.82 45.72,10.46 U1.VIN
  Bottom 0.406: v50.39,7.82 v53.24,4.98

## Text on the board
_tsilk: PCB-ETHMG-BOS | v08-15 | SKAARHOJ / 2015 | 5V | GND | 5V | 23 | 5V | 33 | 5V | 43 | 53 | TOUCH
_bsilk: GITHUB: SKAARHOJ-Open-Engineering